# Altium PCB board.PcbDoc
Units mil, origin at the board's own origin, x right, y up, seen from the top; angles counter-clockwise.
Board outline 2615 x 1755 mil, 2 copper layers (Top Layer, Bottom Layer); 35 components, 40 nets, 170 pads, 31 vias.
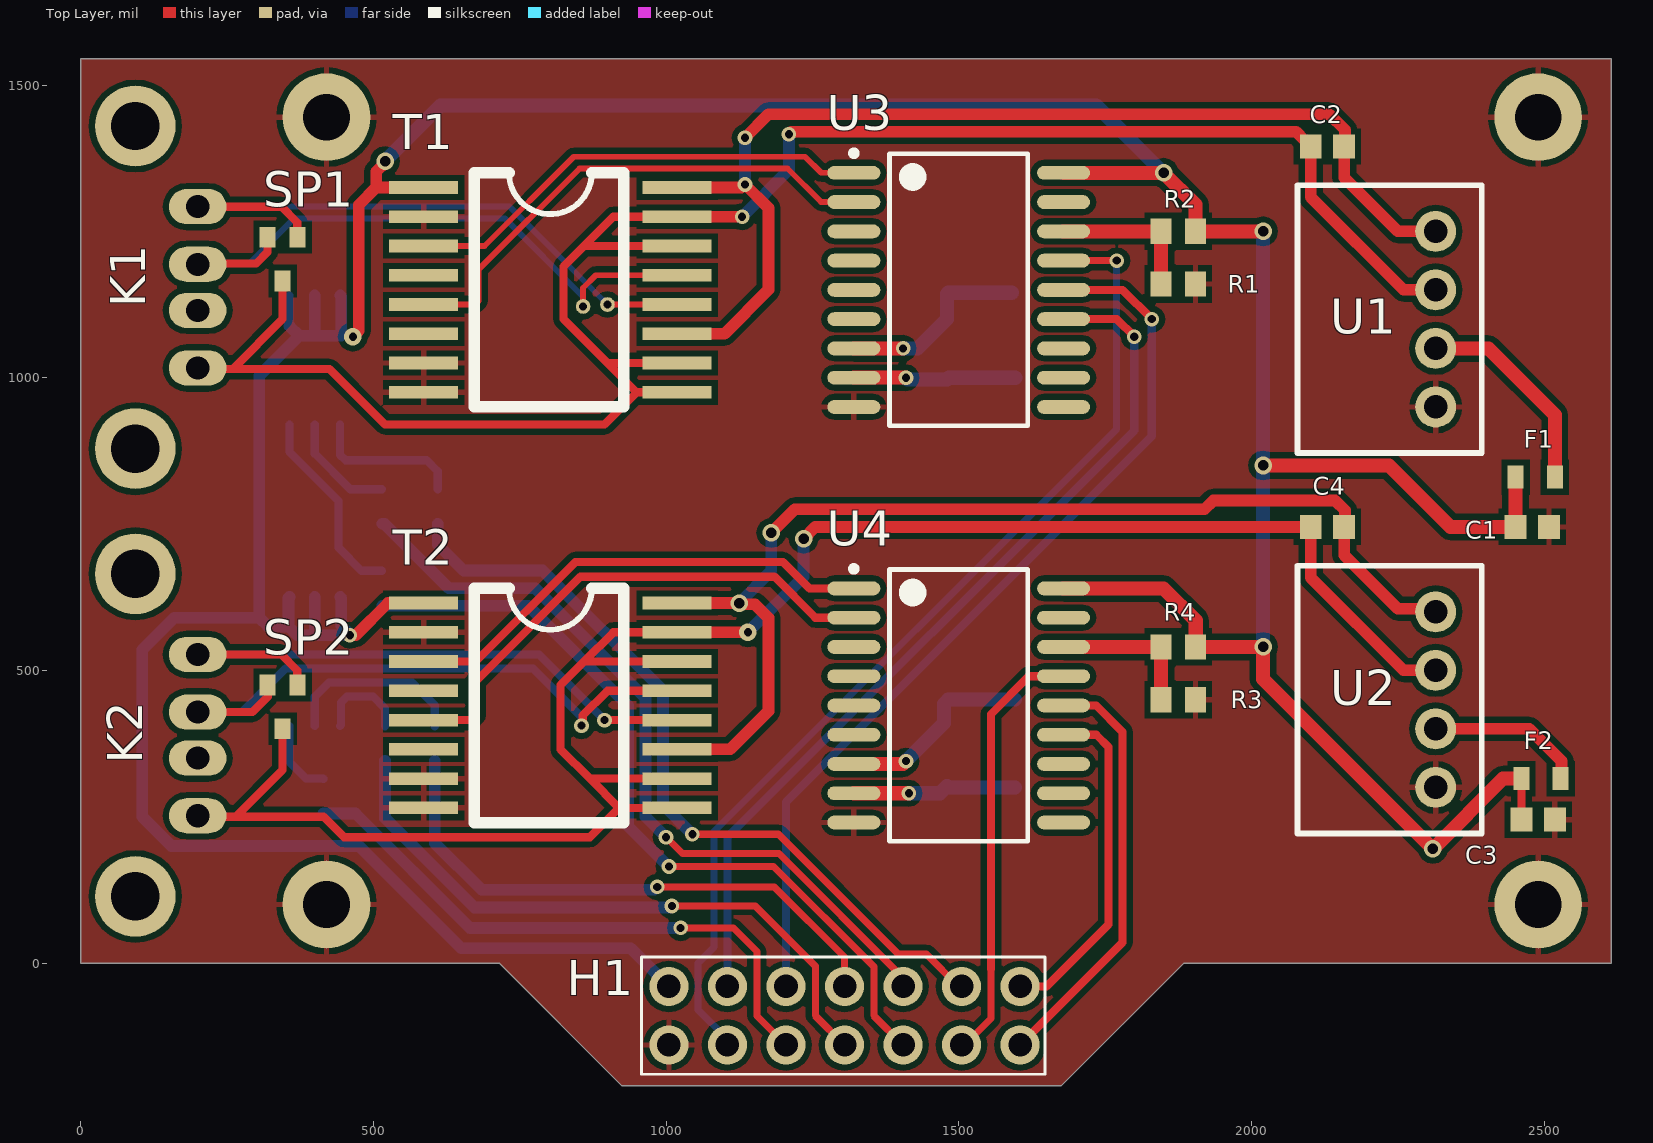
[diagram p0: Top Layer view]
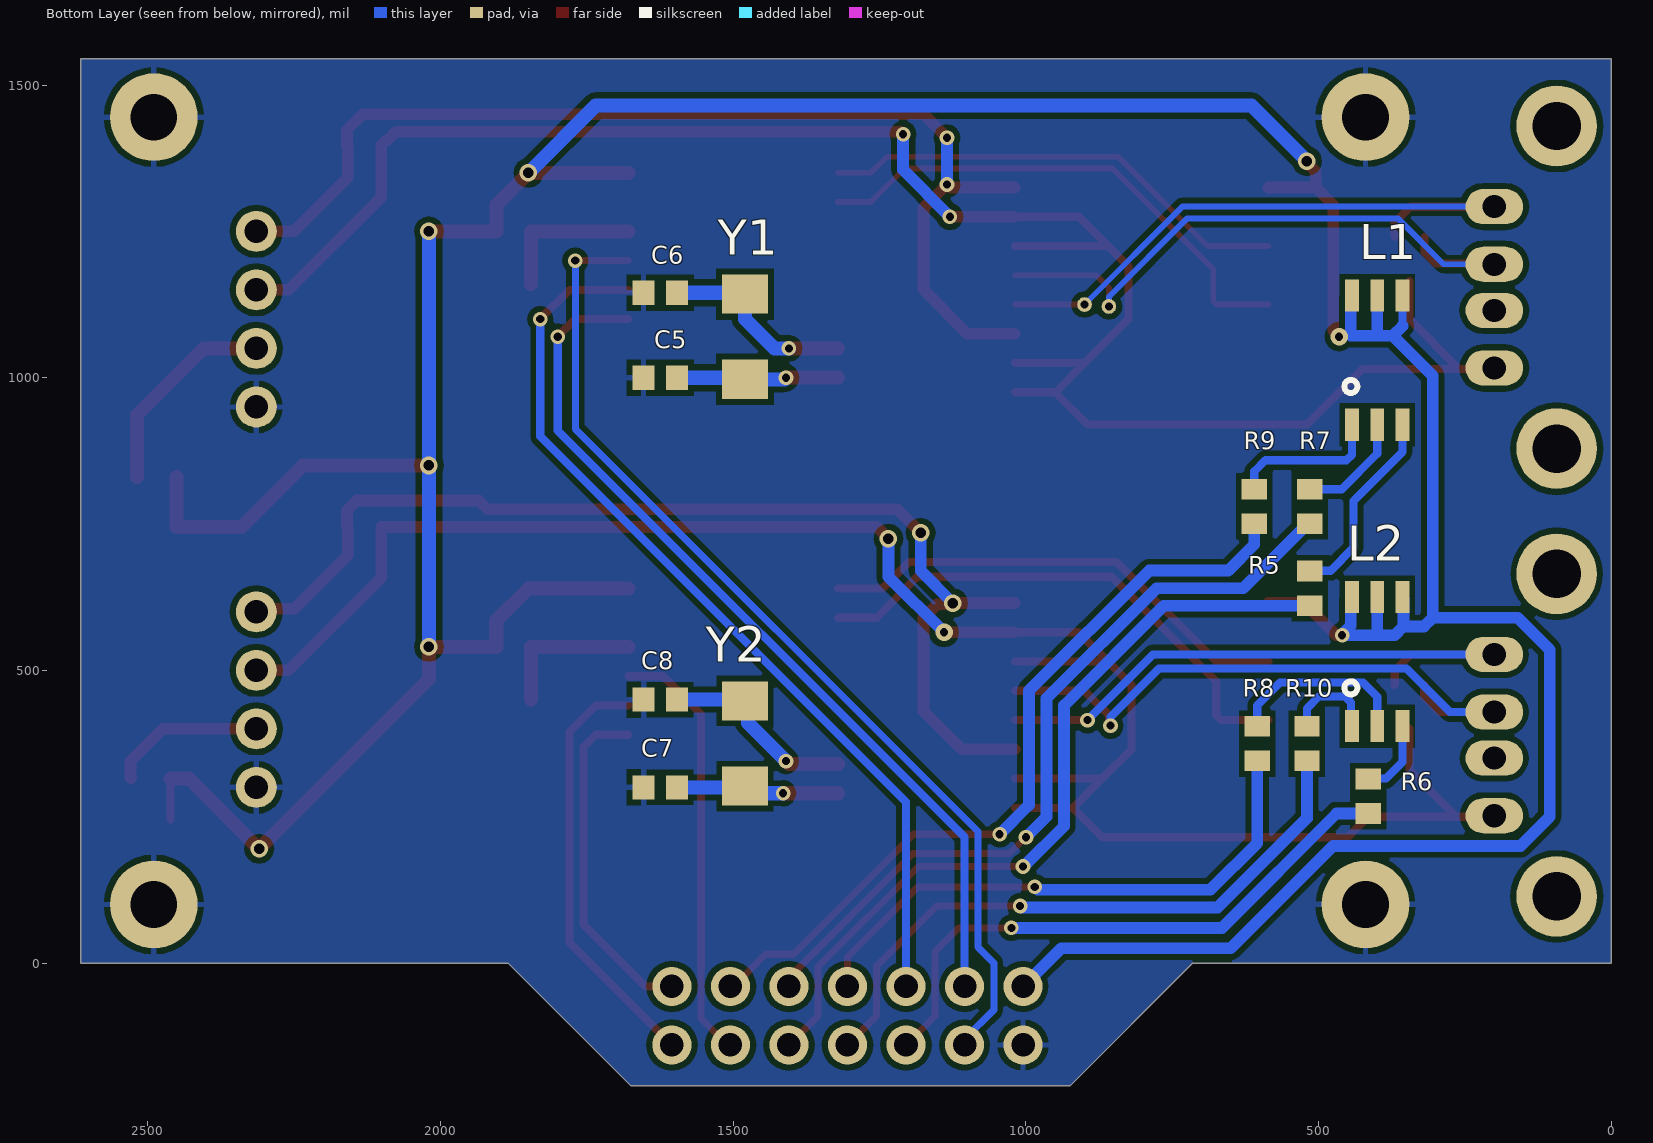
[diagram p1: Bottom Layer view, seen from below]

## Layer stack, top to bottom
Top Solder: solder mask 0.4, Solder Resist, Dk 3.5
Top Layer: signal copper 1.4
Dielectric 1: dielectric 12.6, FR-4, Dk 4.8
Bottom Layer: signal copper 1.4
Bottom Solder: solder mask 0.4, Solder Resist, Dk 3.5

## Board outline
0,0 715,0 925,-210 1675,-210 1885,0 2615,0 2615,1545 0,1545

## Design rules (kind name [scope] priority, off if disabled: settings)
Clearance [All] p1: gap=10 ignorepadtopadclearanceinfootprint=FALSE except(0: Arc-Hole Track-Hole SMDPad-Hole THPad-Hole Via-Hole Fill-Hole Poly-Hole Region-Hole Text-Hole)
PolygonConnect [All] p1: connectstyle=Relief reliefconductorwidth=10 reliefentries=4 polygonreliefangle="90 Angle" airgapwidth=10
RoutingVias [All] p1: holewidth=14 width=25 viastyle="Through Hole" minholewidth=2 minwidth=10 maxholewidth=28 maxwidth=50
SolderMaskExpansion [All] p1: expansion=4 istentingtop=FALSE
Width [All] p1: maxlimit=40 minlimit=10 preferedwidth=10 minimp=50.000000 maximp=50.000000 favimp=50.000000
30 further rules are at their usual default settings.

## Classes and differential pairs
component class logic: C5 C6 C7 C8 R1 R2 R3 R4 SP1 SP2 T1 T2 U3 U4 Y1 Y2
component class extensionBoard: C1 C2 C3 C4 F1 F2 H1 K1 K2 L1 L2 R5 R6 R7 R8 R9 R10 U1 U2

## Components (designator, comment, footprint, x,y, rotation, side; value= is the part's Value field where it differs from the comment)
C1 "4.7uF" CAPC1608X90X35ML10T15 2480,745 r0 top
C2 "10uF" CAPC1608X90X35ML10T15 2130,1395 r180 top
C3 "4.7uF" CAPC1608X90X35ML10T15 2490,245 r0 top
C4 "10uF" CAPC1608X90X35ML10T15 2130,745 r180 top
C5 "27pF" CAPC1608X90X35ML10T15 1625,1000 r180 bottom
C6 "27pF" CAPC1608X90X35ML10T15 1625,1145 r180 bottom
C7 "27pF" CAPC1608X90X35ML10T15 1625,300 r180 bottom
C8 "27pF" CAPC1608X90X35ML10T15 1625,450 r180 bottom
F1 "PPTC 0.2A" "PTC 0603" 2485,830 r0 top
F2 "PPTC 0.2A" "PTC 0603" 2495,315 r0 top
H1 "DIP4*2 Header" DIP7*2 1155,-90 r0 top
K1 "USB A" "USB A" 200,1154.37 r270 top
K2 "USB A" "USB A" 200,389.37 r270 top
L1 "FM-Z3535RGBA-SH" Z3535RGBA 400,1030 r270 bottom
L2 "FM-Z3535RGBA-SH" Z3535RGBA 400,515 r270 bottom
R1 "0Om" RESC1608X55X30ML20T10 1875,1160 r180 top
R2 "0Om" RESC1608X55X30ML20T10 1875,1250 r180 top
R3 "0Om" RESC1608X55X30ML20T10 1875,450 r180 top
R4 "0Om" RESC1608X55X30ML20T10 1875,540 r180 top
R5 "200Om" RESC1608X55X30ML20T10 515,640 r270 bottom
R6 "200Om" RESC1608X55X30ML20T10 415,285 r270 bottom
R7 "255Om" RESC1608X55X30ML20T10 515,780 r270 bottom
R8 "255Om" RESC1608X55X30ML20T10 605,375 r270 bottom
R9 "402Om" RESC1608X55X30ML20T10 610,780 r270 bottom
R10 "402Om" RESC1608X55X30ML20T10 520,375 r270 bottom
SP1 "SP1001-02JTG" SC70-3 345,1240 r180 top
SP2 "SP1001-02JTG" SC70-3 345,475 r180 top
T1 "TJA1052IT/5Y" TJA1052 800,1150 r0 top
T2 "TJA1052IT/5Y" TJA1052 800,440 r0 top
U1 "B0505S-1WR3" "Dip4 package" 2315,950 r90 top
U2 "B0505S-1WR3" "Dip4 package" 2315,300 r90 top
U3 "MCP2515T-I/SO" SOIC-SO18_N 1500,1150 r0 top
U4 "MCP2515T-I/SO" SOIC-SO18_N 1500,440 r0 top
Y1 "8MHz" SMD-5032_2P 1480,1070 r90 bottom
Y2 "8MHz" SMD-5032_2P 1480,375 r90 bottom

## Footprints (in the part's own frame and the unit in brackets; to place one, negate y for a bottom-side part, rotate by r counter-clockwise, add the part's x,y. Pads: shape width x height; smd on the part's side, far side on the other; paste and mask are expansions set on the pad)
CAPC1608X90X35ML10T15 [mm] "Chip Capacitor, 2-Leads, Body 1.60x0.80mm, IPC Low Density"
  rect 0.95x1.05 smd: 1(-0.725,0) 2(0.725,0)
  body extent -0.85,-0.45 0.85,0.45, height 0.9
"Dip4 package" [mil]
  round 70 hole 40: 1(0,0) 2(100,0) 3(200,0) 4(300,0)
  silkscreen extent -79,-79 379,236
DIP7*2 [mm]
  round 1.7 hole 1.02: 1(-3.81,1.27) 2(-1.27,1.27) 3(1.27,1.27) 4(3.81,1.27) 5(6.35,1.27) 6(8.89,1.27) 7(11.43,1.27) 8(-3.81,-1.27) 9(-1.27,-1.27) 10(1.27,-1.27) 11(3.81,-1.27) 12(6.35,-1.27) 13(8.89,-1.27) 14(11.43,-1.27)
  silkscreen extent -5,-2.54 12.5,2.54
"PTC 0603" [mm]
  rect 0.7x1 smd: 1(-0.85,0) 2(0.85,0)
RESC1608X55X30ML20T10 [mm] "Chip Resistor, 2-Leads, Body 1.60x0.80mm, IPC Low Density"
  rect 0.9x1.1 smd: 1(-0.75,0) 2(0.75,0)
  body extent -0.9,-0.5 0.9,0.5, height 0.55
SC70-3 [mm]
  rect 0.7x0.9 smd: 1(-0.65,0) 2(0.65,0) 3(0,1.9)
SMD-5032_2P [mm]
  rect 1.7x2 smd: 1(-1.85,0) 2(1.85,0)
SOIC-SO18_N [mm] "SOIC, 18-Leads, Body 11.6x7.5mm, Pitch 1.27mm, IPC Medium Density"
  oval 2.3x0.6 smd: 1(-4.55,5.08) 2(-4.55,3.81) 3(-4.55,2.54) 4(-4.55,1.27) 5(-4.55,0) 6(-4.55,-1.27) 7(-4.55,-2.54) 8(-4.55,-3.81) 9(-4.55,-5.08) 10(4.55,-5.08) 11(4.55,-3.81) 12(4.55,-2.54) 13(4.55,-1.27) 14(4.55,0) 15(4.55,1.27) 16(4.55,2.54) 17(4.55,3.81) 18(4.55,5.08)
  silkscreen extent -4.67,-5.9 3,6.05, body extent -3.8,-5.87 3.8,5.87, height 2.65
TJA1052 [mm]
  rect 3x0.55 smd: CANH(5.563,0.635) CANL(5.563,-0.635) GND1(-5.436,-4.445) GND1(-5.436,-3.175) GND1(-5.436,3.175) GND2(5.563,-4.445) GND2(5.563,-3.175) GND2(5.563,3.175) RXD(-5.436,-0.635) STB(5.563,1.905) TXD(-5.436,1.905) Vdd1(-5.436,4.445) Vdd2(5.563,-1.905) Vdd2(5.563,4.445) ""(-5.436,-1.905) ""(-5.436,0.635)
  silkscreen extent -3.24,-5.08 3.24,5.08
"USB A" [mm]
  oval 1.524x2.5 hole 1: 1(-3.5,0) 2(-1,0) 3(1,0) 4(3.5,0)
  round 3.5 hole 2.1: ""(-7,-2.71) ""(7,-2.71)
Z3535RGBA [mm]
  rect 1.4x0.6 smd: B+(-2.8,-1.1) B-(2.8,-1.1) G+(-2.8,0) G-(2.8,0) R+(-2.8,1.1) R-(2.8,1.1)
  silkscreen extent 0.86,-1.43 1.43,-0.86

## Part data
C1 C2 C3 C4 C5 C6 C7 C8: library part CMP-2006-02335-1, Manufacturer=Murata, Part Number=GCM1885C2A101JA16D
F1 F2: library part "PTC Resettable Fuse"
R1 R2 R3 R4 R5 R6 R7 R8 R9 R10: library part CMP-2000-01555-1, Manufacturer="KOA Speer", Part Number=RK73H1JTTD5101F
U3 U4: library part CMP-0186-00139-2, "Stand-Alone CAN Controller With SPI Interface, 18-Pin SOIC, Industrial Temperature, Tape and Reel", Code_JEDEC=MS-013, ComponentLink1Description="Manufacturer URL", ComponentLink1URL=http://www.microchip.com/, ComponentLink2Description=Datasheet, ComponentLink2URL=http://ww1.microchip.com/downloads/en/DeviceDoc/21801f.pdf, ComponentLink3Description="Package Specification", ComponentLink3URL=http://www.microchip.com/stellent/groups/techpub_sg/documents/packagingspec/en012702.pdf, DatasheetVersion="revF, Oct-2010", PackageDescription="18-Lead Plastic Small Outline (SO) - Wide 7.50mm Body [SOIC]", PackageReference=SOIC-SO18, PackageVersion="revBB, Aug-2009", RevisionNote="URLs added. DatasheetVersion updated."
Y1 Y2: library part "SMD-5032_2P resonator"
L1 L2: ComponentLink1Description="New link", ComponentLink1URL=https://lcsc.com/product-detail/Light-Emitting-Diodes-LED_SMDLED-120-480mcd_C110903.html
T1 T2: ComponentLink1Description="New link", ComponentLink1URL=https://lcsc.com/product-detail/CAN-ICs_NXP-Semicon_TJA1052IT-5Y_NXP-Semicon-TJA1052IT-5Y_C92210.html
U1 U2: ComponentLink1Description="New link", ComponentLink1URL=https://lcsc.com/product-detail/Power-Modules_B0505S-1WR3_C131038.html

## Free pads (board coordinates)
  round 150 hole 80: 12(420,100) 13(420,1445) 14(2490,100) 15(2490,1445)
  round 25 hole 14: 16(900,1125) 18(858.36,1121.64)

## Via types
v1: diameter 25, hole 14, Top Layer to Bottom Layer, 20 vias
v2: diameter 30, hole 18, Top Layer to Bottom Layer, 9 vias
v3: diameter 30, hole 14, Top Layer to Bottom Layer, 2 vias

## Nets (pads, with @x,y where several pads share a name; then routed paths per layer and width w, separated by ;. In a path a pad name is that pad's centre, name@x,y a point inside that pad or via, vN(x,y) a via of type N, cw(c..) or ccw(c..) an arc to the next point about the centre after c; other vN are vias at no path point)
GND: C1.2 C3.2 C5.1 C6.1 C7.1 C8.1 H1.8 pad.12 pad.13 pad.14 pad.15 R1.1 R3.1 T1.GND1 T2.GND1 U1.1 U2.1 U3.9 U4.9 | length 10.2
  Top Layer w14: U2.1@2315,290.8 U2.1 U2.1@2315.73,299.27
NetC1_1: C1.1 C3.1 F1.1 F2.1 H1.1 L1.B+ L1.G+ L1.R+ L2.B+ L2.G+ L2.R+ R2.1 R4.1 T1.Vdd1 T2.Vdd1 U3.18 U4.18 | length 7472.6
  Top Layer w14: R4.1 R4.1@1905,540.47 ; C3.1 C3.1 F2.1 F2.1
  Top Layer w20: v1(460,560) 470,560 525,615 T2.Vdd1 ; v3(465,1070) 475,1080 475,1295 505,1325 ; v2(520,1370) 520,1367.29 505,1352.29 505,1325 ; T1.Vdd1 505,1325
  Top Layer w24: U4.18 1850,640 1905,585 R4.1@1905,540.47 ; U3.18 v2(1850,1350) 1904.53,1295.47 R2.1 v2(2020,1250) ; R4.1 v2(2020,540) 2020,485 v2(2310,195) 2430,315 F2.1 ; v2(2020,850) 2235,850 2340,745 C1.1 C1.1 F1.1 F1.1
  Bottom Layer w14: 356.69,1088.31 L1.R+
  Bottom Layer w20: L2.R+ 355,623.54 355,575 ; 356.69,1088.31 373.31,1071.69 ; L2.G+ 400,560 ; L1.G+ 400,1071.69 ; L2.B+ 445,623.54 445,576.35 460,561.35 v1(460,560) 400,560 ; L1.B+ 445,1138.54 445,1071.69 400,1071.69 ; H1.1 940,25 650,25 475,200 155,200 105,250 105,535 160,590 305,590 ; 305,590 305,1003.39 373.31,1071.69 ; 305,590 320,575 355,575 ; 355,575 370,560 400,560 ; 373.31,1071.69 400,1071.69
  Bottom Layer w24: v2(520,1370) 615,1465 1735,1465 v2(1850,1350) ; v2(2020,540) v2(2020,850) v2(2020,1250)
NetC2_1: C2.1 T1.Vdd2 U1.4 | length 1911
  Top Layer w20: T1.Vdd2@1019.04,1075 1100,1075 1175,1150 1175,1290 v1(1135,1330) 1133.65,1330 1128.65,1325 T1.Vdd2@1019.04,1325 ; v1(1135,1410) 1175,1450 2133.28,1450 2160,1423.28 2160,1396.45 C2.1 2158.54,1341.45 2250,1250 U1.4
  Bottom Layer w20: v1(1135,1330) v1(1135,1410)
NetC2_2: C2.2 K1.4 SP1.3 T1.GND2 T1.STB U1.3 | length 3396.7
  Top Layer w10: K1.4 K1.4@201.57,1015
  Top Layer w14: K1.4@201.57,1015 260,1015 ; SP1.3 345,1100 260,1015 ; T1.GND2@1019.04,975 950,975 ; T1.GND2@1019.04,1025 900,1025 ; T1.STB 860,1225 ; T1.GND2@1019.04,1275 910,1275 860,1225 ; 260,1015 425,1015 520,920 895,920 950,975 ; 860,1225 825,1190 825,1100 900,1025 ; 900,1025 950,975
  Top Layer w20: T1.GND2@1019.04,1275 v1(1130,1275) ; v1(1210,1416) 1214,1420 2076.45,1420 2090.79,1405.66 2092.76,1405.66 2101.46,1396.96 C2.2 2101.46,1308.54 2260,1150 U1.3
  Bottom Layer w20: v1(1130,1275) 1210,1355 v1(1210,1416)
NetC4_1: C4.1 T2.Vdd2 U2.4 | length 1935.5
  Top Layer w20: T2.Vdd2@1019.04,365 1110,365 1175,430 1175,590 1151.91,613.09 1126.91,613.09 v2(1125,615) T2.Vdd2@1019.04,615 ; v2(1180,735) 1220,775 1920,775 1935,790 2143.28,790 2160,773.28 2160,746.45 C4.1 2158.54,696.45 2250,605 2310,605 U2.4
  Bottom Layer w20: v2(1125,615) 1180,670 v2(1180,735)
NetC4_2: C4.2 K2.4 SP2.3 T2.GND2 T2.STB U2.3 | length 3394.8
  Top Layer w14: K2.4 201.57,250 265,250 ; SP2.3 345,330 265,250 ; T2.GND2@1019.04,265 920,265 ; T2.GND2@1019.04,315 870,315 ; T2.STB 860,515 ; T2.GND2@1019.04,565 910,565 860,515 ; 265,250 415,250 450,215 870,215 920,265 ; 860,515 820,475 820,365 870,315 ; 870,315 920,265
  Top Layer w20: T2.GND2@1019.04,565 v3(1140,565) ; v2(1235,725) 1255,745 C4.2 2101.46,658.54 2260,500 U2.3
  Bottom Layer w20: v3(1140,565) 1235,660 v2(1235,725)
NetC5_2: C5.2 U3.8 Y1.1 | length 277.9
  Top Layer w24: U3.8 v1(1410,1000)
  Bottom Layer w14: v1(1410,1000) v1@1412.83,997.17
  Bottom Layer w24: v1@1412.83,997.17 Y1.1
  Bottom Layer w25: Y1.1 1482.83,1000 C5.2
NetC6_2: C6.2 U3.7 Y1.2 | length 342.4
  Top Layer w24: U3.7 v1(1405,1050)
  Bottom Layer w10: C6.2@1593.62,1147.83 C6.2
  Bottom Layer w14: Y1.2 Y1.2@1482.17,1145 ; C6.2@1590.79,1145 C6.2@1593.62,1147.83
  Bottom Layer w24: v1(1405,1050) 1430,1050 1480,1100 Y1.2
  Bottom Layer w25: Y1.2@1482.17,1145 C6.2@1590.79,1145
NetC7_2: C7.2 U4.8 Y2.1 | length 281.5
  Top Layer w24: U4.8 v1(1415,290)
  Bottom Layer w14: Y2.1 Y2.1@1482.17,300
  Bottom Layer w24: v1(1415,290) 1467.83,290 Y2.1 ; Y2.1@1482.17,300 C7.2
NetC8_2: C8.2 U4.7 Y2.2 | length 340.4
  Top Layer w24: U4.7 1404.73,340 1409.73,345 v1(1410,345)
  Bottom Layer w14: Y2.2 Y2.2@1482.17,450
  Bottom Layer w24: v1(1410,345) 1475,410 1475,442.83 Y2.2 ; Y2.2@1482.17,450 C8.2
NetF1_2: F1.2 U1.2 | length 357
  Top Layer w24: U1.2 2405,1050 2518.46,936.54 F1.2
NetF2_2: F2.2 U2.2 | length 268.4
  Top Layer w20: U2.2 2475,400 2530,345 2530,316.54 F2.2
NetH1_2: H1.2 U3.13 | length 1531.2
  Top Layer w14: U3.13 1770,1100 v1(1800,1070)
  Bottom Layer w14: H1.2 1105,215 1800,910 v1(1800,1070)
NetH1_3: H1.3 U3.14 | length 1570.5
  Top Layer w14: U3.14 1780,1150 v1(1830,1100)
  Bottom Layer w14: H1.3 1205,275 1830,900 v1(1830,1100)
NetH1_4: H1.4 R8.2 | length 975.5
  Top Layer w12: v1(985,130) 1185,130 1305,10 H1.4
  Bottom Layer w20: R8.2 605,204.85 684.85,125 980,125 v1(985,130)
NetH1_5: H1.5 R7.2 | length 1344.7
  Top Layer w12: v1(1000,215) 1028,187 1192.86,187 1405,-25.14 H1.5
  Bottom Layer w20: R7.2 518.94,750.47 628.94,640.47 776.95,640.47 965,452.43 965,250 v1(1000,215)
NetH1_6: H1.6 R9.2 | length 1357.3
  Top Layer w12: v1(1045,220) 1192.23,220 1397.23,15 1445,15 1500,-40 H1.6
  Bottom Layer w20: R9.2 610,715 654.53,670.47 789.38,670.47 995,464.85 995,270 v1(1045,220)
NetH1_7: H1.7 U4.13 | length 583.5
  Top Layer w14: H1.7 1650,-40 1756,66 1756,369 1735,390 U4.13
NetH1_9: H1.9 U3.15 | length 1747.7
  Top Layer w12: U3.15 v1(1770,1200)
  Bottom Layer w12: H1.9@1105,-130 1055,-80 1055,0 1082,27 1082,224.53 1770,912.53 v1(1770,1200)
  Bottom Layer w14: H1.9 H1.9@1105,-130
NetH1_10: H1.10 R6.2 | length 1018.2
  Top Layer w12: v1(1025,60) 1115,60 1155.54,19.46 1155.54,-90.54 H1.10
  Bottom Layer w20: R6.2 469.53,255.47 665,60 v1(1025,60)
NetH1_11: H1.11 R10.2 | length 1095.4
  Top Layer w12: v1(1010,97.5) 1152.5,97.5 1255,-5 1255,-90 H1.11
  Bottom Layer w20: R10.2 520,247.43 672.43,95 1007.5,95 v1(1010,97.5)
NetH1_12: H1.12 R5.2 | length 1370.6
  Top Layer w12: v1(1005,165) 1183.75,165 1355,-6.25 1355,-90 H1.12
  Bottom Layer w20: R5.2 764.53,610.47 935,440 935,234.04 1004.04,165 v1(1005,165)
NetH1_13: H1.13 U4.15 | length 739.7
  Top Layer w12: H1.13@1510,-140 1555,-95 1555,-10
  Top Layer w14: H1.13 H1.13@1510,-140 ; 1555,-10 1555,425 1620,490 U4.15
NetH1_14: H1.14 U4.14 | length 727
  Top Layer w14: H1.14 1780,35 1780,395 1735,440 U4.14
NetK1_1: K1.1 pad.16 SP1.1 T1.CANL | length 1094.8
  Top Layer w10: SP1.1@370,1240.59 SP1.1 ; pad.16 T1.CANL
  Top Layer w14: K1.1 342.83,1292.17 370,1265 SP1.1@370,1240.59
  Bottom Layer w10: K1.1 732.83,1292.17 pad.16
NetK1_2: K1.2 pad.18 SP1.2 T1.CANH | length 1117.9
  Top Layer w10: K1.2 K1.2@201.26,1195 ; pad.18 858.36,1153.36 880,1175 T1.CANH
  Top Layer w14: K1.2@201.26,1195 300,1195 319.41,1214.41 SP1.2
  Bottom Layer w10: K1.2 286.57,1193.74 365,1272.17 724.55,1272.17 858.36,1138.36 pad.18
NetK2_1: K2.1 SP2.1 T2.CANL | length 1072
  Top Layer w14: K2.1 342.83,527.17 370,500 370,475.59 SP2.1 ; v1(895,415) T2.CANL
  Bottom Layer w14: K2.1 782.83,527.17 v1(895,415)
NetK2_2: K2.2 SP2.2 T2.CANH | length 1083.6
  Top Layer w14: K2.2 293.74,428.74 320,455 320,474.41 SP2.2 ; v1(855.53,405.53) 857.63,407.63 857.63,422.63 900,465 T2.CANH
  Bottom Layer w14: K2.2 275.57,428.74 350,503.17 772.89,503.17 855.53,420.53 v1(855.53,405.53)
NetL1_B-: L1.B- R9.1 | length 260.4
  Bottom Layer w14: L1.B- 443.31,868.2 452.51,859 591,859 610,840 R9.1
NetL1_G-: L1.G- R7.1 | length 189.8
  Bottom Layer w14: L1.G- 400,870 460.47,809.53 R7.1
NetL1_R-: L1.R- R5.1 | length 336
  Bottom Layer w14: L1.R- 356.69,873.31 440.47,789.53 440.47,709.53 480,670 514.53,670 R5.1
NetL2_B-: L2.B- R10.1 | length 159
  Bottom Layer w14: L2.B- 445,406.46 445,445 455.17,455.17 499.83,455.17 520,435 R10.1
NetL2_G-: L2.G- R8.1 | length 316.9
  Bottom Layer w14: L2.G- 400,455 424.17,479.17 565.83,479.17 605,440 R8.1
NetL2_R-: L2.R- R6.1 | length 131.7
  Bottom Layer w14: L2.R- 356.69,343.31 385,315 414.53,315 R6.1
NetR1_2: R1.2 R2.2 U3.16 | length 256.3
  Top Layer w24: U3.16 R2.2 R1.2
NetR3_2: R3.2 R4.2 U4.16 | length 256.3
  Top Layer w24: U4.16 R4.2 R3.2
NetT1_RXD: T1.RXD U3.2 | length 886.7
  Top Layer w10: T1.RXD 674.14,1125 680,1130.86 680,1185 852.5,1357.5 1207.5,1357.5 1265,1300 U3.2
NetT1_TXD: T1.TXD U3.1 | length 809.5
  Top Layer w10: T1.TXD 690,1225 842.5,1377.5 1237.5,1377.5 1265,1350 U3.1
NetT2_RXD: T2.RXD U4.2 | length 899.3
  Top Layer w14: T2.RXD 666.8,415 675,423.2 675,481.06 853.94,660 1185,660 1255,590 U4.2
NetT2_TXD: T2.TXD U4.1 | length 824
  Top Layer w14: T2.TXD 675,515 845,685 1200,685 1245,640 U4.1
pads on no net: K1. K1.3 K2. K2.3 T1. T2. U3.3 U3.4 U3.5 U3.6 U3.10 U3.11 U3.12 U3.17 U4.3 U4.4 U4.5 U4.6 U4.10 U4.11 U4.12 U4.17

## Polygon pours and split planes (outlines as drawn)
GND on Top Layer "NONET_L-01_P-001" (solid, pour order 0): 0,1545 0,0 715,0 925,-210 1675,-210 1885,0 2615,0 2615,1545
GND on Bottom Layer "NONET_L-01_P-001" (solid, pour order 1): 0,1545 0,0 715,0 925,-210 1675,-210 1885,0 2615,0 2615,1545

## Silkscreen, mask and mechanical layers (free items; w line width, h text height)
Mechanical 1:
  the board outline again, w5